# Altium PCB Mainboard PCB.pcbdoc (part 1 of 2)
Units mil, origin at the board's own origin, x right, y up, seen from the top; angles counter-clockwise.
Board outline 6050 x 5225 mil, 2 copper layers (Top Layer, Bottom Layer); 153 components, 224 nets, 656 pads, 330 vias.
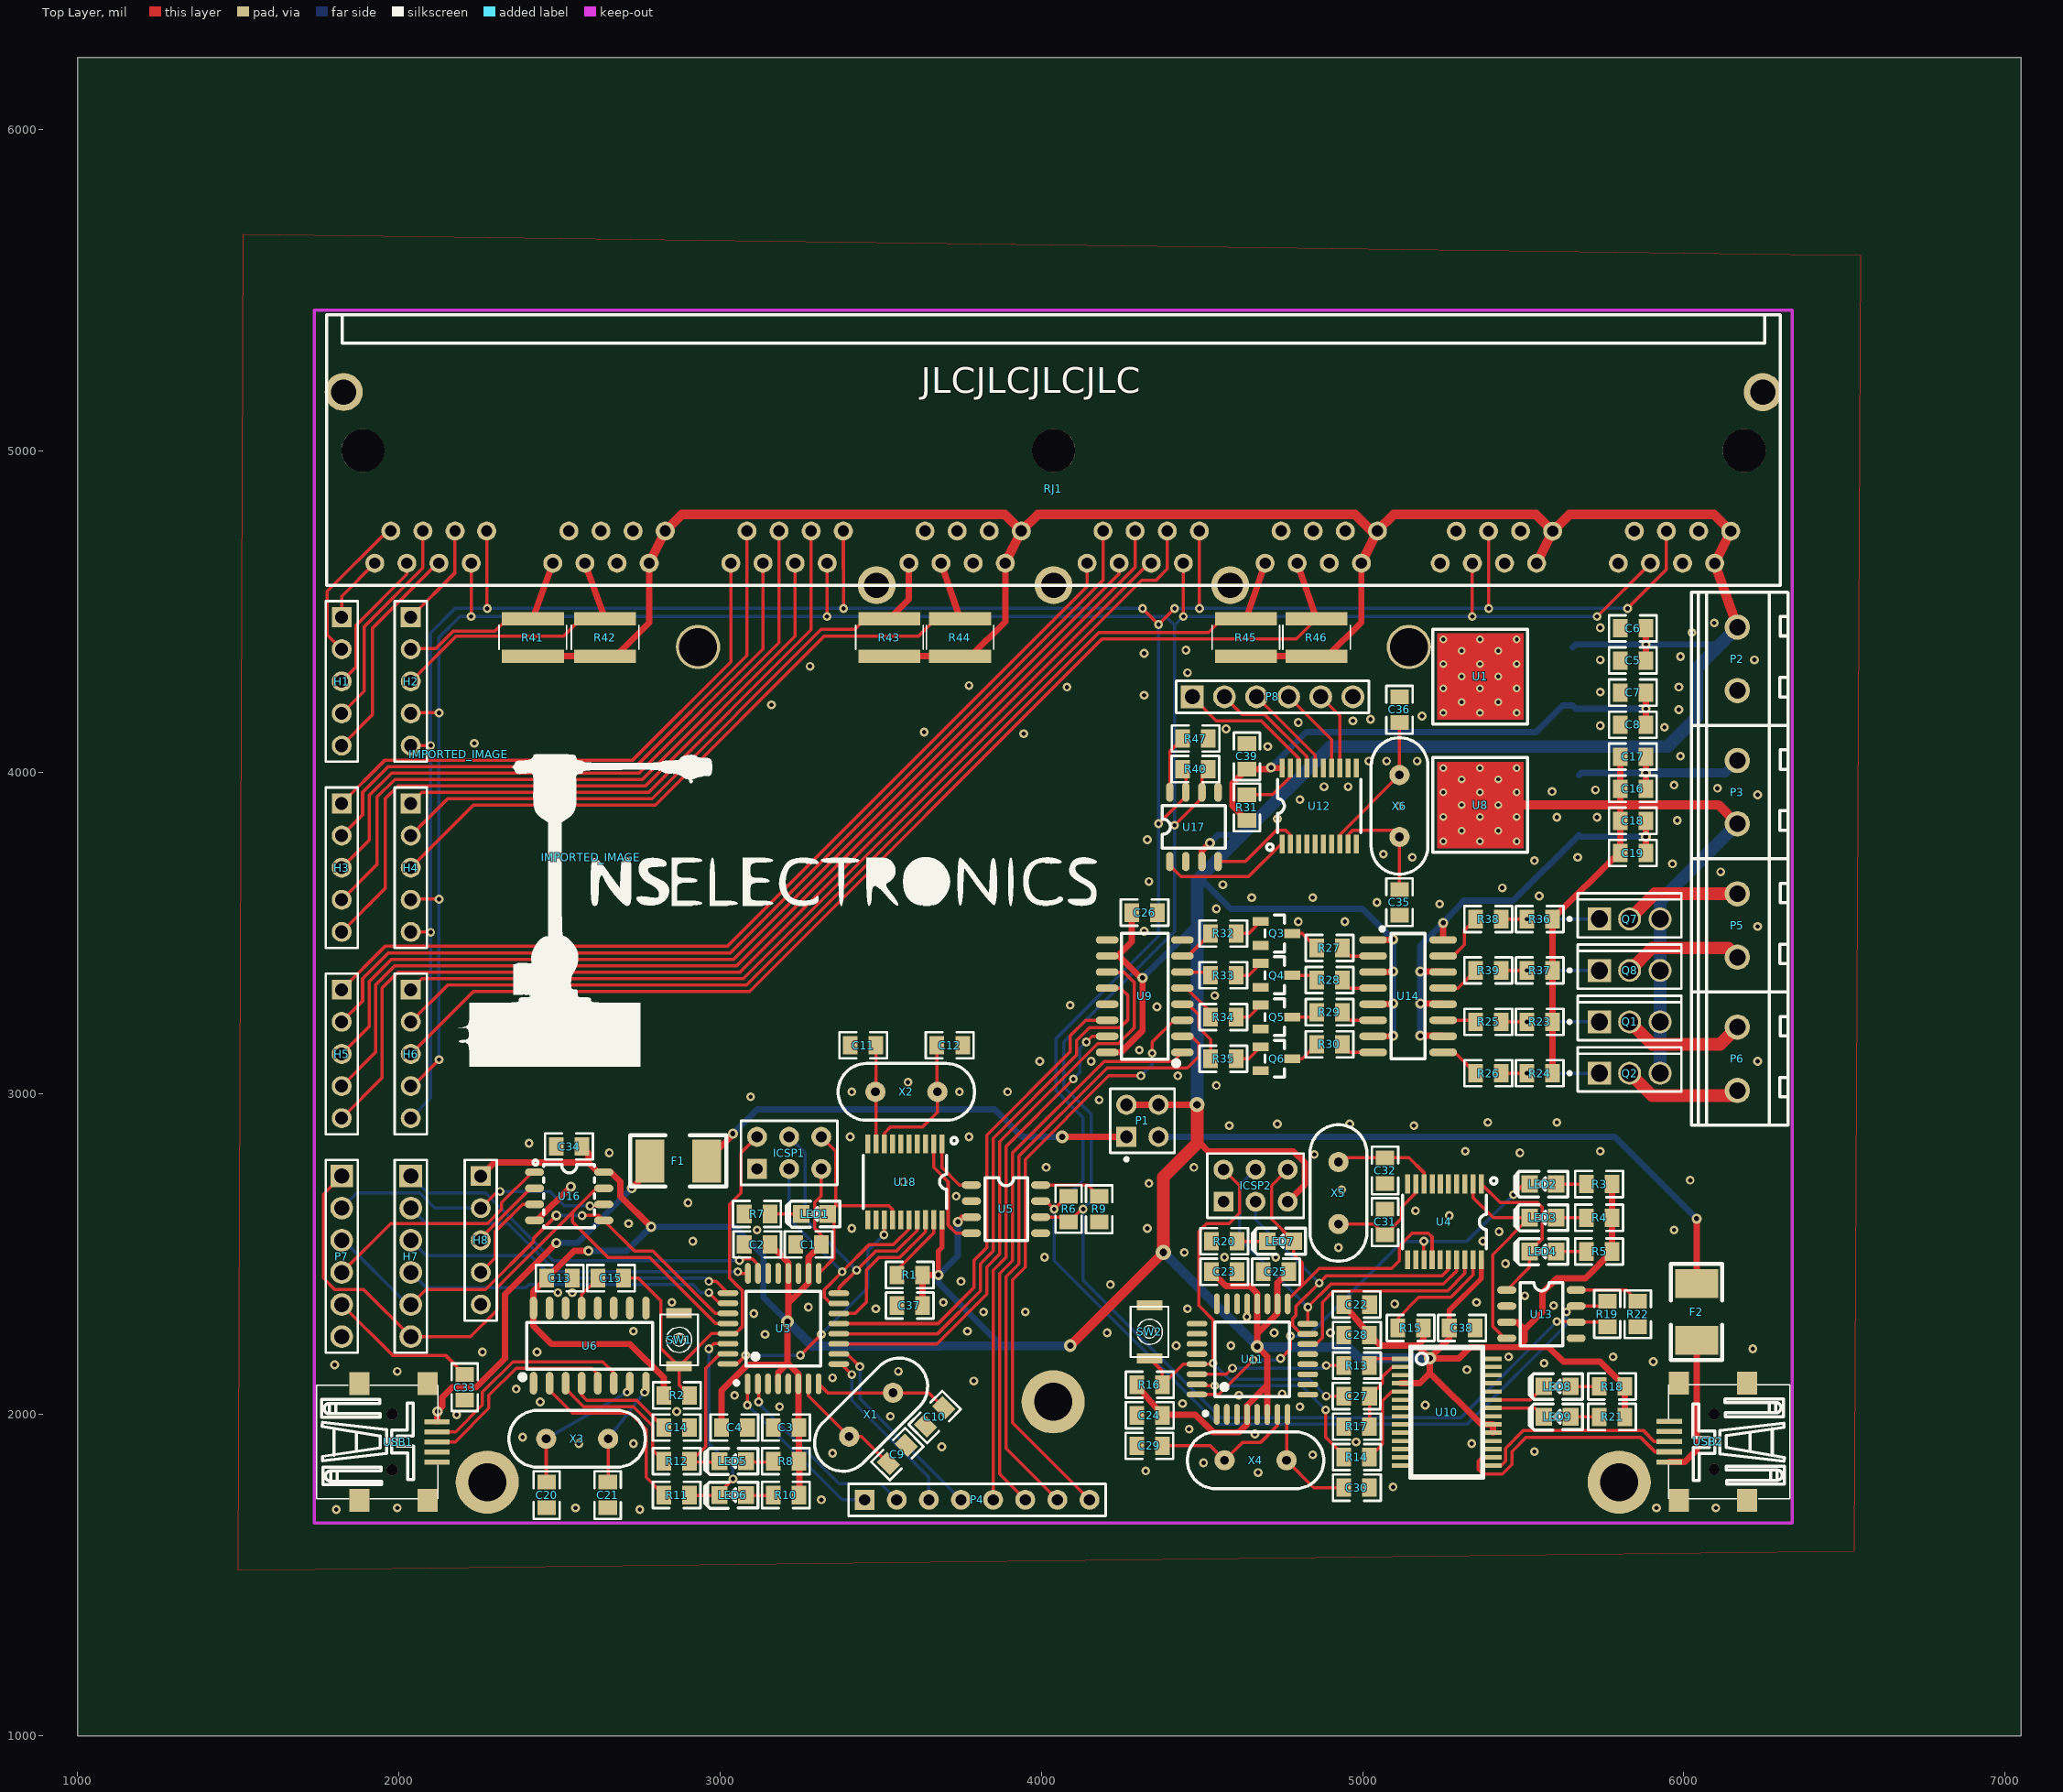
[diagram p0: Top Layer view]
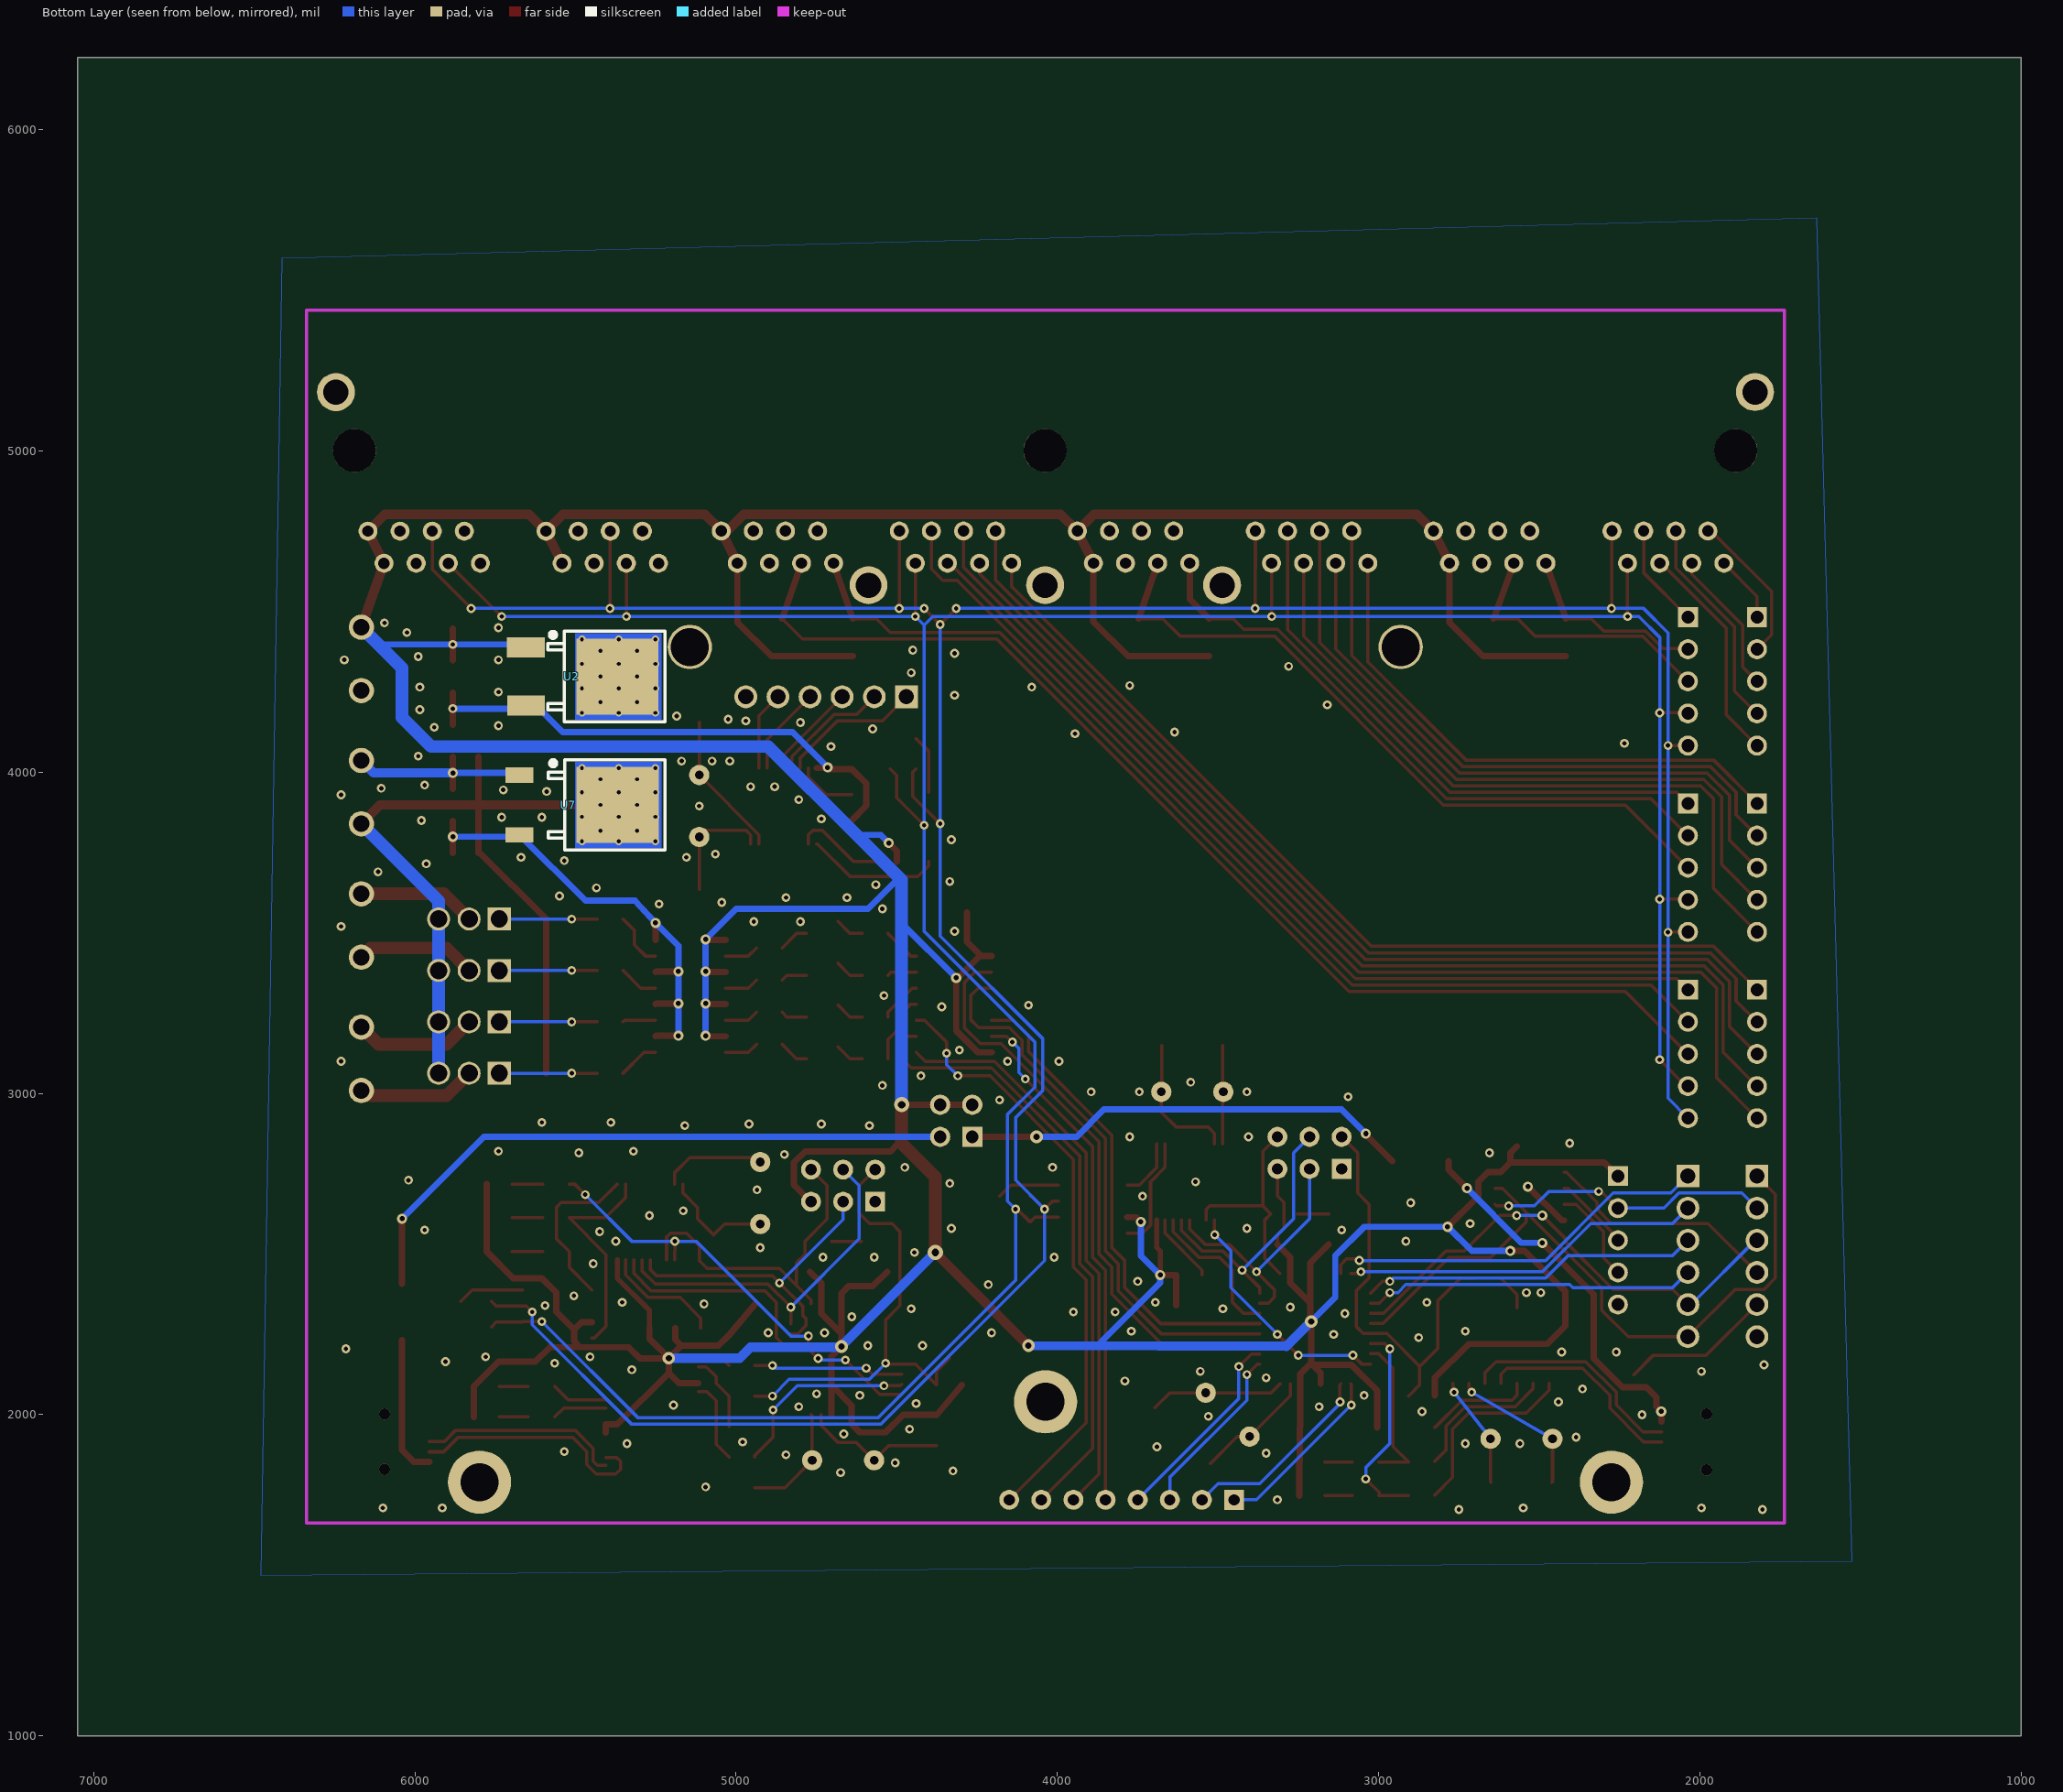
[diagram p1: Bottom Layer view, seen from below]

## Layer stack, top to bottom
Top Layer: signal copper (thickness not stored)
Dielectric: dielectric 12.6, FR-4, Dk 4.8
Bottom Layer: signal copper (thickness not stored)

## Board outline
7050,1000 1000,1000 1000,6225 7050,6225

## Components (designator, comment, footprint, x,y, rotation, side; value= is the part's Value field where it differs from the comment)
C1 "2.2uF" 0805#1 3315,2530 r180 top
C2 "100nF" 0805#1 3155,2530 r180 top
C3 "100nF" 0805#1 3245,1960 r180 top
C4 "100nF" 0805#1 3005,1960 r0 top
C5 "100nF" 0805#2 5841.99,4348.01 r0 top
C6 "10uF" 0805#2 5841.99,4448.01 r0 top
C7 "100nF" 0805#2 5841.99,4248.01 r0 top
C8 "10uF" 0805#2 5841.99,4148.01 r0 top
C9 "22pF" 0805#1 3580,1905 r225 top
C10 "22pF" 0805#1 3640,1965 r45 top
C11 "27pF" 0805#2 3445,3150 r180 top
C12 "27pF" 0805#2 3715,3150 r0 top
C13 "100nF" 0805#1 2540,2425 r180 top
C14 "100nF" 0805#1 2825,1960 r0 top
C15 "100nF" 0805#1 2700,2425 r180 top
C16 "100nF" 0805#2 5841.99,3948.75 r0 top
C17 "10uF" 0805#2 5841.99,4048.75 r0 top
C18 "100nF" 0805#2 5841.99,3848.75 r0 top
C19 "10uF" 0805#2 5841.99,3748.75 r0 top
C20 "22pF" 0805#1 2460,1710 r90 top
C21 "22pF" 0805#1 2650,1710 r90 top
C22 "2.2uF" 0805#1 4941.99,2343.01 r0 top
C23 "100nF" 0805#1 4530,2445 r0 top
C24 "100nF" 0805#1 4376.99,1998.01 r180 top
C25 "100nF" 0805#1 4770,2445 r180 top
C26 "100nF" 0805#1 4281.99,3563.01 r0 top
C27 "100nF" 0805#1 4941.99,2058.01 r0 top
C28 "100nF" 0805#1 5021.99,2248.01 r180 top
C29 "22pF" 0805#1 4296.99,1903.01 r0 top
C30 "22pF" 0805#1 5021.99,1773.01 r180 top
C31 "27pF" 0805#2 5070,2600 r90 top
C32 "27pF" 0805#2 5070,2760 r270 top
C33 "10uF" 0805#1 2205,2125 r270 top
C34 "100nF" 0805#1 2490,2835 r0 top
C35 "27pF" 0805#2 5115,3595 r270 top
C36 "27pF" 0805#2 5115,4195 r90 top
C37 "100nF" 0805#1 3630,2340 r180 top
C38 "100nF" 0805#1 5270,2270 r0 top
C39 "100nF" 0805#1 4640,4010 r90 top
F1 "MF-MSMF030-2" 1812 2870,2790 r0 top
F2 "MF-MSMF030-2" 1812 6040,2320 r90 top
H1 "ODrive1.1" HDR-5X1/2.54 1821.99,4283.01 r270 top
H2 "ODrive1.2" HDR-5X1/2.54 2036.99,4283.01 r270 top
H3 "ODrive2.1" HDR-5X1/2.54 1821.99,3703.01 r270 top
H4 "ODrive2.2" HDR-5X1/2.54 2036.99,3703.01 r270 top
H5 "ODrive3.1" HDR-5X1/2.54 1821.99,3123.01 r270 top
H6 "ODrive3.2" HDR-5X1/2.54 2036.99,3123.01 r270 top
H7 "GPIO" HDR-TH_6P-P2.54-V 2037.01,2492.99 r270 top
H8 "ATTINY GPIO" HDR-5X1/2.54 2255,2542.99 r270 top
ICSP1 "ICSP" HDR-3X2/2.54 3115,2765 r0 top
ICSP2 "ICSP" HDR-3X2/2.54 4566.99,2663.01 r0 top
IMPORTED_IMAGE "IMPORTED_IMAGE" IMPORTED_IMAGE 2185.26,4056.6 r0 top
IMPORTED_IMAGE "IMPORTED_IMAGE" IMPORTED_IMAGE 2597.66,3735.52 r0 top
LED1 "FC-A2012BK-470H2" LED-0805 3295,2625 r0 top
LED2 "FC-2012UGK-520D5" LED-0805 5561.99,2718.01 r0 top
LED3 "FC-2012UGK-520D5" LED-0805 5561.99,2613.01 r0 top
LED4 "FC-2012UGK-520D5" LED-0805 5561.99,2508.01 r0 top
LED5 "FC-2012UGK-520D5" LED-0805 3040,1855 r0 top
LED6 "FC-2012UGK-520D5" LED-0805 3040,1750 r0 top
LED7 "FC-A2012BK-470H2" LED-0805 4745,2540 r0 top
LED8 "FC-2012UGK-520D5" LED-0805 5606.99,2088.01 r0 top
LED9 "FC-2012UGK-520D5" LED-0805 5606.99,1993.01 r0 top
P1 "USB POWER" HDR-TH_4PIN-V-ROW2-COL2-MALE-PITCH2.54 4315,2915 r90 top
P2 "Power" WJ301V-5.00-2P 6166.99,4353.01 r270 top
P3 "Power2" WJ301V-5.00-2P 6166.99,3938.01 r270 top
P4 "GPIO" HDR-8X1/2.54 3800,1735 r0 top
P5 "Power" WJ301V-5.00-2P 6166.99,3523.01 r270 top
P6 "Power" WJ301V-5.00-2P 6166.99,3108.01 r270 top
P7 "ATTINY Prog" HDR-6X1/2.54 1821.99,2493.01 r270 top
P8 "CAN SPI" HDR-6X1/2.54 4720,4235 r0 top
Q1 "2SC5353BL-T60-K" TO-126C 5831.99,3223.01 r90 top
Q2 "2SC5353BL-T60-K" TO-126C 5831.99,3063.01 r90 top
Q3 "LMBT3904LT1G" SOT-23(SOT-23-3) 4731.99,3498.01 r270 top
Q4 "LMBT3904LT1G" SOT-23(SOT-23-3) 4731.99,3368.01 r270 top
Q5 "LMBT3904LT1G" SOT-23(SOT-23-3) 4731.99,3238.01 r270 top
Q6 "LMBT3904LT1G" SOT-23(SOT-23-3) 4731.99,3108.01 r270 top
Q7 "2SC5353BL-T60-K" TO-126C 5831.99,3543.01 r90 top
Q8 "2SC5353BL-T60-K" TO-126C 5831.99,3383.01 r90 top
R1 "10k" 0805#2 3590,2435 r180 top
R2 "10k" 0805#1 2905,2060 r180 top
R3 "1k" 0805#2 5736.99,2718.01 r0 top
R4 "1k" 0805#2 5736.99,2613.01 r0 top
R5 "1k" 0805#2 5736.99,2508.01 r0 top
R6 "100" 0805#2 4085,2640 r270 top
R7 "1k" 0805#1 3075,2625 r0 top
R8 "1k" 0805#1 3165,1855 r0 top
R9 "20k" 0805#2 4180,2640 r90 top
R10 "1k" 0805#1 3165,1750 r0 top
R11 "1k" 0805#1 2825,1750 r0 top
R12 "1k" 0805#1 2825,1855 r0 top
R13 "1k" 0805#1 5021.99,2153.01 r180 top
R14 "1k" 0805#1 5021.99,1868.01 r180 top
R15 "10k" 0805#2 5150,2270 r0 top
R16 "10k" 0805#1 4376.99,2093.01 r180 top
R17 "1k" 0805#2 4981.99,1963.01 r180 top
R18 "1k" 0805#1 5736.99,2088.01 r0 top
R19 "100" 0805#2 5761.99,2313.01 r270 top
R20 "1k" 0805#1 4530,2540 r0 top
R21 "1k" 0805#1 5736.99,1993.01 r0 top
R22 "20k" 0805#2 5856.99,2313.01 r90 top
R23 "100k" 0805#1 5511.99,3223.01 r0 top
R24 "100k" 0805#1 5511.99,3063.01 r0 top
R25 "1k" 0805#1 5351.99,3223.01 r0 top
R26 "1k" 0805#1 5351.99,3063.01 r0 top
R27 "220" 0805#1 4936.99,3453.01 r180 top
R28 "220" 0805#1 4936.99,3353.01 r180 top
R29 "220" 0805#1 4936.99,3253.01 r180 top
R30 "220" 0805#1 4936.99,3153.01 r180 top
R31 "10k" 0805#2 4640,3890 r270 top
R32 "1k" 0805#1 4526.99,3498.01 r0 top
R33 "1k" 0805#1 4526.99,3368.01 r0 top
R34 "1k" 0805#1 4526.99,3238.01 r0 top
R35 "1k" 0805#1 4526.99,3108.01 r0 top
R36 "100k" 0805#1 5511.99,3543.01 r0 top
R37 "100k" 0805#1 5511.99,3383.01 r0 top
R38 "1k" 0805#1 5351.99,3543.01 r0 top
R39 "1k" 0805#1 5351.99,3383.01 r0 top
R40 "100" 0805#2 4480,4010 r0 top
R41 "10k" R_1218 2416.99,4478.01 r270 top
R42 "10k" R_1218 2641.99,4478.01 r270 top
R43 "10k" R_1218 3526.99,4478.01 r270 top
R44 "10k" R_1218 3746.99,4478.01 r270 top
R45 "10k" R_1218 4636.99,4478.01 r270 top
R46 "10k" R_1218 4856.99,4478.01 r270 top
R47 "20k" 0805#2 4480,4105 r180 top
RJ1 "DS1130-S80BP" DS1130-S80BP 4036.99,4883.01 r0 top
SW1 "SKRKAEE020" SKRKAEE020 2871.99,2233.01 r270 top
SW2 "SKRKAEE020" SKRKAEE020 4336.99,2258.01 r270 top
U1 "Heatsink 6.8x6.8" "HEATSINK 6.8X6.8" 5366.99,4298.01 r0 top
U2 "AP7363-33D-13" TO-252-3_L6.5-W5.8-P4.58-BR 5511.99,4298.01 r180 bottom
U3 "ATMEGA328P-AU" TQFP-32_7X7X08P 3196.99,2268.01 r90 top
U4 "MCP2515T-I/ST" TSSOP-20_L6.5-W4.4-P0.65-LS6.4-BL 5255,2600 r180 top
U5 "MCP2551T-I/SN" SOIC-8_L5.0-W4.0-P1.27-LS6.0-BL 3890,2640 r270 top
U6 "CH340G" SOIC-16_150MIL#1 2595,2210 r0 top
U7 "BA7805FP-E2" TO-252-2 5521.99,3898.01 r90 bottom
U8 "Heatsink 6.8x6.8" "HEATSINK 6.8X6.8" 5366.99,3898.01 r0 top
U9 "SN74HC595DR" SOIC-16_150MIL#2 4321.99,3303.01 r90 top
U10 "FT232RLSSOP" SSOP28DB 5261.99,2008.01 r270 top
U11 "ATMEGA328P-AU" TQFP-32_7X7X08P 4656.99,2173.01 r90 top
U12 "MCP2515T-I/ST" TSSOP-20_L6.5-W4.4-P0.65-LS6.4-BL 4865,3895 r0 top
U13 "MCP2551T-I/SN" SOIC-8_L5.0-W4.0-P1.27-LS6.0-BL 5556.99,2313.01 r270 top
U14 "PS2801-4" SOP-16_150MIL 5141.99,3303.01 r0 top
U16 "ATTINY85V-10SU" SOIC-8_L4.9-W3.9-P1.27-LS6.0-BL 2530,2680 r270 top
U17 "MCP2551T-I/SN" SOIC-8_L5.0-W4.0-P1.27-LS6.0-BL 4475,3830 r0 top
U18 "MCP2515T-I/ST" TSSOP-20_L6.5-W4.4-P0.65-LS6.4-BL 3575,2725 r180 top
USB1 "MINI 5PMotherboard Copper shell with column LCPVinyl" USB-MINI-3 1876.99,1733.01 r270 top
USB2 "MINI 5PMotherboard Copper shell with column LCPVinyl" USB-MINI-3 6196.99,2098.01 r90 top
X1 "16MHz" OSC-49S-1 3470,2000 r315 top
X2 "16MHz" OSC-49S-1 3580,3005 r270 top
X3 "12MHz" OSC-49S-1 2555,1925 r270 top
X4 "16MHz" OSC-49S-1 4666.99,1858.01 r270 top
X5 "16MHz" OSC-49S-1 4925,2690 r0 top
X6 "16MHz" OSC-49S-1 5115,3895 r0 top

## Footprints (in the part's own frame and the unit in brackets; to place one, negate y for a bottom-side part, rotate by r counter-clockwise, add the part's x,y. Pads: shape width x height; smd on the part's side, far side on the other; paste and mask are expansions set on the pad)
0805#1 [mm]
  rect 1.16x1.47 smd: 1(0,0) 2(2.032,0)
  silkscreen extent -0.88,-1.04 2.89,1.04
0805#2 [mm]
  rect 1.16x1.45 smd: 1(-1.016,0) 2(1.016,0)
  silkscreen extent -1.9,-1.03 1.87,1.04
1812 [mil]
  rect 90x133.86 smd: 1(-88,0) 2(88,0)
  silkscreen extent -150,-80 150,80
DS1130-S80BP [mm]
  round 3 hole 2: 0(-56.109,7.635) 0(-13.967,-7.635) 0(0.028,-7.635) 0(13.998,-7.635) 0(56.109,7.63)
  round 1.5 hole 0.9: 1(-53.647,-5.895) 2(-52.377,-3.355) 3(-51.107,-5.895) 4(-49.837,-3.355) 5(-48.567,-5.895) 6(-47.297,-3.355) 7(-46.027,-5.895) 8(-44.798,-3.355) 9(-39.568,-5.895) 10(-38.298,-3.355) 11(-37.028,-5.895) 12(-35.758,-3.355) 13(-34.488,-5.895) 14(-33.218,-3.355) 15(-31.948,-5.895) 16(-30.678,-3.355) 17(-25.486,-5.895) 18(-24.216,-3.355) 19(-22.946,-5.895) 20(-21.676,-3.355) 21(-20.406,-5.895) 22(-19.136,-3.355) 23(-17.866,-5.895) 24(-16.596,-3.355) 25(-11.407,-5.895) 26(-10.137,-3.355) 27(-8.867,-5.895) 28(-7.597,-3.355) 29(-6.327,-5.895) 30(-5.057,-3.355) 31(-3.787,-5.895) 32(-2.517,-3.355) 33(2.672,-5.895) 34(3.942,-3.355) 35(5.212,-5.895) 36(6.482,-3.355) 37(7.752,-5.895) 38(9.022,-3.355) 39(10.292,-5.895) 40(11.562,-3.355) 41(16.751,-5.895) 42(18.021,-3.355) 43(19.291,-5.895) 44(20.561,-3.355) 45(21.831,-5.895) 46(23.101,-3.355) 47(24.371,-5.895) 48(25.641,-3.355) 49(30.607,-5.9) 50(31.877,-3.36) 51(33.147,-5.9) 52(34.417,-3.36) 53(35.687,-5.9) 54(36.957,-3.36) 55(38.227,-5.9) 56(39.497,-3.36) 57(44.686,-5.9) 58(45.956,-3.36) 59(47.226,-5.9) 60(48.496,-3.36) 61(49.766,-5.9) 62(51.036,-3.36) 63(52.306,-5.9) 64(53.576,-3.36)
  round 3.4 hole 3.4 unplated: ""(-54.59,3.015) ""(0.028,3.015) ""(54.648,3.015)
  silkscreen extent -57.45,-7.64 57.5,13.76
HDR-3X2/2.54 [mil]
  rect 62x62 hole 35: 1(0,0)
  round 62 hole 35: 2(0,100) 3(100,0) 4(100,100) 5(200,0) 6(200,100)
  silkscreen extent -50,-50 250,150
HDR-5X1/2.54 [mil]
  rect 62x62 hole 40.16: 1(-200,0)
  round 62 hole 40.16: 2(-100,0) 3(0,0) 4(100,0) 5(200,0)
  silkscreen extent -250,-50 250,50
HDR-6X1/2.54 [mm]
  rect 1.8x1.8 hole 1.2: 1(-6.35,0)
  round 1.8 hole 1.2: 2(-3.81,0) 3(-1.27,0) 4(1.27,0) 5(3.81,0) 6(6.35,0)
  silkscreen extent -7.62,-1.27 7.62,1.27
HDR-8X1/2.54 [mil]
  rect 62x62 hole 35: 1(-350,0)
  round 62 hole 35: 2(-250,0) 3(-150,0) 4(-50,0) 5(50,0) 6(150,0) 7(250,0) 8(350,0)
  silkscreen extent -400,-50 400,50
HDR-TH_4PIN-V-ROW2-COL2-MALE-PITCH2.54 [mm]
  rect 1.6x1.6 hole 1: 1(-1.27,1.27)
  round 1.6 hole 1: 2(1.27,1.27) 3(-1.27,-1.27) 4(1.27,-1.27)
  silkscreen extent -3.18,-2.54 2.54,2.54
HDR-TH_6P-P2.54-V [mm]
  rect 1.8x1.8 hole 1.2: 1(-6.35,0)
  round 1.8 hole 1.2: 2(-3.81,0) 3(-1.27,0) 4(1.27,0) 5(3.81,0) 6(6.35,0)
  silkscreen extent -7.62,-1.27 7.62,1.27
"HEATSINK 6.8X6.8" [mil]
  round 0 smd far side: 2(-0.11,0.11)
  round 0 smd: 2(0.11,-0.11)
  Top Layer region: -133.75,-133.97 133.97,-133.97 133.97,133.75 -133.75,133.75
  Bottom Layer region: -133.97,-133.75 133.75,-133.75 133.75,133.97 -133.97,133.97
  silkscreen extent -148,-147 147,148
IMPORTED_IMAGE [mil]
  silkscreen extent 0,-973 789,0
LED-0805 [mil]
  rect 51.2x55.1 smd: 1(40.7,0.05) 2(-42,0.05)
  silkscreen extent -88,-41 78,40
OSC-49S-1 [mm]
  round 1.6 hole 0.7: 1(0,2.45) 2(0,-2.45)
  silkscreen extent -2.25,-5.39 2.25,5.39
R_1218 [mm]
  rect 1.05x4.9 smd: 1(0,0) 2(2.96,0)
  silkscreen extent 0.53,-2.67 2.43,2.67
SKRKAEE020 [mm]
  rect 0.8x2 smd: 1(-2.1,0) 2(2.1,0)
  silkscreen extent -2,-1.5 2,1.5
SOIC-8_L4.9-W3.9-P1.27-LS6.0-BL [mm]
  oval 0.6x1.518 smd: 1(-1.905,-2.74) 2(-0.635,-2.74) 3(0.635,-2.74) 4(1.905,-2.74) 5(1.905,2.74) 6(0.635,2.74) 7(-0.635,2.74) 8(-1.905,2.74)
  silkscreen extent -2.86,-2.86 2.5,2
SOIC-8_L5.0-W4.0-P1.27-LS6.0-BL [mm]
  oval 0.6x1.518 smd: 1(-1.905,-2.74) 2(-0.635,-2.74) 3(0.635,-2.74) 4(1.905,-2.74) 5(1.905,2.74) 6(0.635,2.74) 7(-0.635,2.74) 8(-1.905,2.74)
  silkscreen extent -2.49,-1.67 2.5,1.7
SOIC-16_150MIL#1 [mil]
  oval 23.62x70.79 smd: 1(-176,-112) 2(-126,-112) 3(-76,-112) 4(-26,-112) 5(24,-112) 6(74,-112) 7(124,-112) 8(174,-112) 9(174,122) 10(124,122) 11(74,122) 12(24,122) 13(-26,122) 14(-76,122) 15(-126,122) 16(-176,122)
  silkscreen extent -218,-101 195,77
SOIC-16_150MIL#2 [mil]
  oval 23.62x70.79 smd: 1(-175,-117) 2(-125,-117) 3(-75,-117) 4(-25,-117) 5(25,-117) 6(75,-117) 7(125,-117) 8(175,-117) 9(175,117) 10(125,117) 11(75,117) 12(25,117) 13(-25,117) 14(-75,117) 15(-125,117) 16(-175,117)
  silkscreen extent -217,-106 196,72
SOP-16_150MIL [mil]
  oval 86.53x23.62 smd: 1(-109,175) 2(-109,125) 3(-109,75) 4(-109,25) 5(-109,-25) 6(-109,-75) 7(-109,-125) 8(-109,-175) 9(109,-175) 10(109,-125) 11(109,-75) 12(109,-25) 13(109,25) 14(109,75) 15(109,125) 16(109,175)
  silkscreen extent -87,-195 53,215
SOT-23(SOT-23-3) [mm]
  rect 0.7x1.25 smd: 1(-0.95,-1.25) 2(0.95,-1.25) 3(0,1.25)
  silkscreen extent -1.46,-0.9 1.46,0.65
SSOP28DB [mil]
  rect 13.7x55 smd: 1(-166,-144) 2(-141,-144) 3(-115,-144) 4(-90,-144) 5(-64,-144) 6(-38,-144) 7(-13,-144) 8(13,-144) 9(38,-144) 10(64,-144) 11(90,-144) 12(115,-144) 13(141,-144) 14(166,-144) 15(166,144) 16(141,144) 17(115,144) 18(90,144) 19(64,144) 20(38,144) 21(13,144) 22(-13,144) 23(-38,144) 24(-64,144) 25(-90,144) 26(-115,144) 27(-141,144) 28(-166,144)
  silkscreen extent -205,-115 205,115
TO-126C [mil]
  rect 71.5x71.5 hole 54: 1(0,94.5)
  round 71.5 hole 54: 2(0,0.5) 3(0,-94.5)
  silkscreen extent -57,-161 81,192
TO-252-2 [mil]
  rect 47.24x86.62 smd: 1(93,152.6) 3(-93,152.4)
  rect 236.22x255.9 smd: 4(0,-152.6)
  silkscreen extent -141,-301 141,63
TO-252-3_L6.5-W5.8-P4.58-BR [mil]
  rect 118.1x63 smd: 1(-142.4,90.52)
  rect 255.9x236.2 smd: 2(142.4,-0.03)
  rect 118.2x63 smd: 3(-142.15,-90.53)
  silkscreen extent -74,-141 290,141
TQFP-32_7X7X08P [mm]
  oval 1.65x0.45 smd: 1(-4.369,2.817) 2(-4.369,2.017) 3(-4.369,1.217) 4(-4.369,0.417) 5(-4.369,-0.381) 6(-4.369,-1.181) 7(-4.369,-1.981) 8(-4.369,-2.781) 17(4.369,-2.791) 18(4.369,-1.991) 19(4.369,-1.191) 20(4.369,-0.391) 21(4.369,0.406) 22(4.369,1.207) 23(4.369,2.007) 24(4.369,2.807)
  oval 0.45x1.65 smd: 9(-2.804,-4.381) 10(-2.004,-4.381) 11(-1.204,-4.381) 12(-0.404,-4.381) 13(0.394,-4.381) 14(1.194,-4.381) 15(1.994,-4.381) 16(2.794,-4.381) 25(2.804,4.381) 26(2.004,4.381) 27(1.204,4.381) 28(0.404,4.381) 29(-0.394,4.381) 30(-1.194,4.381) 31(-1.994,4.381) 32(-2.794,4.381)
  silkscreen extent -4.45,-2.94 2.95,3.86
TSSOP-20_L6.5-W4.4-P0.65-LS6.4-BL [mil]
  rect 15.74x58.8 smd: 1(-115.16,-118.16) 5(-12.8,-118.14) 6(12.74,-118.14) 7(38.38,-118.14) 8(63.97,-118.14) 9(89.56,-118.14) 10(115.15,-118.14) 19(-89.56,117.95) 20(-115.16,118.16)
  rect 15.75x58.8 smd: 2(-89.56,-118.14) 3(-63.97,-118.14) 4(-38.38,-118.14) 11(115.16,118.16) 12(89.57,118.16) 13(63.98,118.16) 14(38.39,118.16) 15(12.8,118.16) 16(-12.79,118.16) 17(-38.38,118.16) 18(-63.97,117.95)
  silkscreen extent -164,-138 130,83
USB-MINI-3 [mm]
  rect 1.8x1.6 smd: 0(-9.25,5.4) 0(-9.25,0) 0(0,5.4) 0(0,0)
  rect 0.4x2 smd: 1(-6.225,6.148) 2(-5.425,6.148) 3(-4.625,6.148) 4(-3.825,6.148) 5(-3.025,6.148)
  silkscreen extent -9.12,-3.4 -0.12,6.2
WJ301V-5.00-2P [mm]
  round 2 hole 1.3: 1(-2.504,0) 2(2.504,0)
  silkscreen extent -5.27,-3.62 5.26,4.01

## Free pads (board coordinates)
  round 196.85 hole 118.11: 1(2274.99,1790) 1(4037,2040.01) 1(5799.01,1790)
  round 137.79 hole 118.11: 1(2931.37,4390.01) 1(5144.25,4390.01)

## Via types
v1: diameter 27.56, hole 13.78, Top Layer to Bottom Layer, 259 vias
v2: diameter 24.41, hole 12, Top Layer to Bottom Layer, 36 vias
v3: diameter 31.5, hole 15.75, Top Layer to Bottom Layer, 24 vias
v4: diameter 39.37, hole 19.69, Top Layer to Bottom Layer, 5 vias
v5: diameter 35.43, hole 35.43, Top Layer to Bottom Layer, 4 vias
v6: diameter 47.24, hole 23.62, Top Layer to Bottom Layer, 2 vias

## Nets (pads, with @x,y where several pads share a name; then routed paths per layer and width w, separated by ;. In a path a pad name is that pad's centre, name@x,y a point inside that pad or via, vN(x,y) a via of type N, cw(c..) or ccw(c..) an arc to the next point about the centre after c; other vN are vias at no path point)
1.1: RJ1.57
1.2: RJ1.58
1ATT1: H8.2 P7.2 U16.6 | length 897
  Top Layer w10: H8.2@2255,2642.99 2307.01,2694.99 v1(2315.01,2694.99) ; v1(2595.01,2649.99) 2632.87,2650 U16.6@2637.87,2655
  Bottom Layer w10: P7.2@1821.99,2643.01 1868.99,2690.01 2064.99,2690.01 2111.99,2643.01 H8.2@2255,2642.99 ; v1(2315.01,2694.99) 2469.99,2695.01 2514.99,2650.01 v1(2595.01,2649.99)
1ATT3: H8.3 U16.2 | length 238.3
  Top Layer w10: H8.3@2255,2542.99 2254.99,2550.01 2409.99,2705.01 U16.2@2422.13,2705
1ATT4: H8.4 U16.3 | length 303
  Top Layer w10: H8.4@2255,2442.99 2299.99,2488.01 2299.99,2570.01 2384.99,2654.99 U16.3@2422.13,2655
1ATTR: P7.4 U16.1 | length 740.8
  Top Layer w10: P7.4@1821.99,2443.01 1974.99,2595.01 2274.99,2595.01 2319.99,2640.01 2319.99,2660.01 2414.99,2755.01 U16.1@2422.13,2755
1SR1: P4.5 U9.15 | length 1617.6
  Top Layer w10: P4.5@3850,1735 3849.99,2450.01 3889.99,2490.01 3889.99,2834.98 v1(4100.01,3044.99) ; v1(4140.01,3159.99) 4158.02,3178.01 U9.15@4204.99,3178.01
  Bottom Layer w10: v1(4100.01,3044.99) 4119.99,3065.01 4119.99,3140.01 v1(4140.01,3159.99)
1SR2: P4.6 U9.1 | length 1788.4
  Top Layer w10: P4.6@3950,1735 3869.99,1815.01 3869.99,2440.01 3909.99,2480.01 3909.99,2815.01 4194.99,3100.01 4410.99,3100.01 U9.1@4438.99,3128.01
1SR3: P4.7 U9.2 | length 1941.8
  Top Layer w10: P4.7@4050,1735 3889.99,1895.01 3889.99,2430.01 3929.99,2470.01 3929.99,2805.01 4204.99,3080.01 4454.99,3080.01 4489.99,3115.01 4489.99,3155.01 4466.99,3178.01 U9.2@4438.99,3178.01
1SR4: P4.8 U9.3 | length 1885.3
  Top Layer w10: P4.8@4150,1735 3909.99,1975.01 3909.99,2420.01 3949.99,2460.01 3949.99,2795.01 4209.99,3055.01 v1(4310.01,3054.99) ; v1(4345.01,3124.99) 4344.99,3160.01 4412.99,3228.01 U9.3@4438.99,3228.01
  Bottom Layer w10: v1(4310.01,3054.99) 4345,3090 v1(4345.01,3124.99)
1SR5: R35.1 U9.4 | length 217
  Top Layer w10: U9.4@4438.99,3278.01 4456.99,3278.01 4489.99,3245.01 4489.99,3205.01 4526.99,3168.01 R35.1@4527.01,3107.99
1SR6: R34.1 U9.5 | length 134.1
  Top Layer w10: U9.5@4438.99,3328.01 4451.99,3328.01 4527.01,3252.99 R34.1@4527.01,3237.99
1SR7: R33.1 U9.6 | length 92.2
  Top Layer w10: U9.6@4438.99,3378.01 4516.99,3378.01 R33.1@4527.01,3367.99
1SR8: R32.1 U9.7 | length 117
  Top Layer w10: U9.7@4438.99,3428.01 4457.02,3428.01 R32.1@4527.01,3497.99
2.1: RJ1.49
2.2: RJ1.50
3.1: H6.2 R45.1 RJ1.41 | length 3302.7
  Top Layer w10: H6.2@2036.99,3223.01 2151.99,3338.01 3081.99,3338.01 4178.99,4435.01 4519.99,4435.01 4562.99,4478.01 R45.1@4636.99,4478.01
  Top Layer w19.68: R45.1@4636.99,4478.01 RJ1.41@4696.49,4650.9
4.1: H5.1 RJ1.33 | length 2912.8
  Top Layer w10: H5.1@1821.99,3323.01 1956.99,3458.01 3021.99,3458.01 4142.19,4578.2 RJ1.33@4142.19,4650.9
4.2: H5.2 RJ1.34 | length 3133.5
  Top Layer w10: H5.2@1821.99,3223.01 1886.99,3288.01 1886.99,3358.01 1966.99,3438.01 3031.99,3438.01 4192.19,4598.2 RJ1.34@4192.19,4750.9
4.3: H5.3 RJ1.35 | length 3154.2
  Top Layer w10: H5.3@1821.99,3123.01 1906.99,3208.01 1906.99,3348.01 1976.99,3418.01 3041.99,3418.01 4242.19,4618.2 RJ1.35@4242.19,4650.9
4.4: H5.4 RJ1.36 | length 3375
  Top Layer w10: H5.4@1821.99,3023.01 1926.99,3128.01 1926.99,3338.01 1986.99,3398.01 3051.99,3398.01 4292.19,4638.2 RJ1.36@4292.19,4750.9
4.5: H5.5 RJ1.37 | length 3399.9
  Top Layer w10: H5.5@1821.99,2923.01 1946.99,3048.01 1946.99,3328.01 1996.99,3378.01 3061.99,3378.01 4334.9,4650.9 RJ1.37@4342.19,4650.9
4.6: H6.1 RJ1.38 | length 3015.6
  Top Layer w10: H6.1@2036.99,3323.01 2071.99,3358.01 3071.99,3358.01 4311.99,4598.01 4356.99,4598.01 4392.19,4633.2 RJ1.38@4392.19,4750.9
5VIN1: F1.1 USB1.1 | length 1167.6
  Top Layer w19.68: USB1.1@2119.04,1978.08 v3(2119.99,2010.01) 2134.99,2025.01 2134.99,2054.11 2165.89,2085.01 2239.99,2085.01 2329.99,2175.01 2329.99,2178.61 2329.99,2374.99 v3(2490.01,2534.99) ; v3(2725.01,2704.99) 2782.01,2761.99 F1.1@2782,2790
  Bottom Layer w19.68: v3(2490.01,2534.99) 2555.01,2534.99 v3(2725.01,2704.99)
5VIN2: F2.1 USB2.1 | length 442.4
  Top Layer w19.68: USB2.1@5954.95,1852.93 6002.92,1852.92 6040,1890 F2.1@6040,2232
6.1: H3.1 RJ1.17 | length 1701.4
  Top Layer w10: H3.1@1821.99,3903.01 1956.99,4038.01 2727.99,4038.01 3033.59,4343.6 RJ1.17@3033.59,4650.9
6.2: H3.2 RJ1.18 | length 1922.1
  Top Layer w10: H3.2@1821.99,3803.01 1886.99,3868.01 1886.99,3938.01 1966.99,4018.01 2737.99,4018.01 3083.59,4363.6 RJ1.18@3083.59,4750.9
6.3: H3.3 RJ1.19 | length 1942.8
  Top Layer w10: H3.3@1821.99,3703.01 1906.99,3788.01 1906.99,3928.01 1976.99,3998.01 2747.99,3998.01 3133.59,4383.6 RJ1.19@3133.59,4650.9
6.4: H3.4 RJ1.20 | length 2163.5
  Top Layer w10: H3.4@1821.99,3603.01 1931.99,3713.01 1931.99,3923.01 1986.99,3978.01 2757.99,3978.01 3183.59,4403.6 RJ1.20@3183.59,4750.9
6.5: H3.5 RJ1.21 | length 2184.2
  Top Layer w10: H3.5@1821.99,3503.01 1956.99,3638.01 1956.99,3918.01 1996.99,3958.01 2767.99,3958.01 3233.59,4423.6 RJ1.21@3233.59,4650.9
6.6: H4.1 RJ1.22 | length 1777.8
  Top Layer w10: H4.1@2036.99,3903.01 2071.99,3938.01 2777.99,3938.01 3283.59,4443.6 RJ1.22@3283.59,4750.9
7.1: H2.2 R41.1 RJ1.9 | length 603.1
  Top Layer w10: H2.2@2036.99,4383.01 2038.99,4385.01 2114.99,4385.01 2169.99,4440.01 2299.99,4440.01 2337.99,4478.01 R41.1@2416.99,4478.01
  Top Layer w19.68: R41.1@2416.99,4478.01 RJ1.9@2479.2,4650.9
7.3: H2.3 R42.1 RJ1.11 | length 869.7
  Top Layer w10: H2.3@2036.99,4283.01 2176.99,4423.01 2511.99,4423.01 2566.99,4478.01 R42.1@2641.99,4478.01
  Top Layer w19.68: RJ1.11@2579.2,4650.9 R42.1@2641.99,4478.01
8.1: H1.1 RJ1.1 | length 210.5
  Top Layer w10: H1.1@1821.99,4483.01 1821.99,4548.01 RJ1.1@1924.89,4650.9
8.2: H1.2 RJ1.2 | length 474.4
  Top Layer w10: H1.2@1821.99,4383.01 1776.99,4428.01 1776.99,4563.01 1964.89,4750.9 RJ1.2@1974.89,4750.9
8.3: H1.3 RJ1.3 | length 451.9
  Top Layer w10: H1.3@1821.99,4283.01 1866.99,4328.01 1866.99,4458.01 2024.89,4615.9 RJ1.3@2024.89,4650.9
8.4: H1.4 RJ1.4 | length 672.7
  Top Layer w10: H1.4@1821.99,4183.01 1891.99,4253.01 1891.99,4453.01 2074.89,4635.9 RJ1.4@2074.89,4750.9
8.5: H1.5 RJ1.5 | length 696.3
  Top Layer w10: H1.5@1821.99,4083.01 1916.99,4178.01 1916.99,4448.01 2119.89,4650.9 RJ1.5@2124.89,4650.9
8.6: H2.1 RJ1.6 | length 325
  Top Layer w10: H2.1@2036.99,4483.01 2174.89,4620.9 RJ1.6@2174.89,4750.9
+3.3V: C7.2 C8.2 C39.1 R31.2 U2.3 U12.20 | length 1660.6
  Top Layer w19.68: R31.2@4640,3850 4595,3895 4595,3965 C39.1@4640.01,4010.01 4710.02,4010.01 v3(4715.01,4014.99) 4716.85,4013.15 U12.20@4749.84,4013.16 ; C8.2@5881.99,4148.01 v1(5881.99,4198.01) C7.2@5881.99,4248.01
  Bottom Layer w19.68: v3(4715.01,4014.99) 4825.02,4125.01 5539.99,4125.01 5622.49,4207.51 U2.3@5654.15,4207.48 ; U2.3@5654.15,4207.48 5663.62,4198.01 v1(5881.99,4198.01)
+5V: C1.1 C2.1 C3.1 C4.1 C5.2 C6.2 C13.2 C22.1 C23.1 C24.1 C25.1 C26.1 C28.1 C34.2 C37.1 C38.1 H8.1 ICSP1.5 ICSP2.5 P1.2 P1.4 P2.1 R1.1 R2.2 R3.2 R4.2 R5.2 R8.2 R10.2 R15.2 R16.2 R18.2 R21.2 R41.2 R42.2 R43.2 R44.2 R45.2 R46.2 RJ1.15 RJ1.16 RJ1.31 RJ1.32 RJ1.47 RJ1.48 RJ1.55 RJ1.56 RJ1.63 RJ1.64 U2.1 U3.4 U3.6 U3.18 U3.20 U4.20 U5.3 U6.16 U9.10 U9.16 U10.4 U10.19 U10.20 U11.4 U11.6 U11.18 U11.20 U13.3 U14.1 U14.3 U14.5 U14.7 U16.8 U17.3 U18.20 | length 24365.9
  Top Layer w10: C1.1@3314.99,2530.01 3314.99,2560.01 3294.99,2580.01 3294.99,2660.01 3314.99,2680.01 ICSP1.5@3315,2765
  Top Layer w15.75: v3(3680.01,2434.99) 3679.99,2510.01 3690.2,2520.2 U18.20@3690.16,2606.84 ; C38.1@5270.01,2269.99 5269.99,2325.01 5370.19,2425.2 U4.20@5370.16,2481.84
  Top Layer w19.68: H8.1@2255,2742.99 2296.99,2785.01 2589.99,2785.01 ; R41.2@2416.99,4361.47 R42.2@2641.99,4361.47 ; C34.2@2570.01,2834.99 2589.99,2815.01 2589.99,2785.01 ; v3(2590.01,2509.99) 2544.98,2510 C13.2@2459.99,2425.01 2419,2384.02 U6.16@2419,2332 2419,2276 2475,2220 2720,2220 2824.99,2115.01 R2.2@2824.99,2060.01 ; U16.8@2637.87,2755 2660.01,2754.99 2690,2725 2690,2680 v3(2785.01,2584.99) ; U16.8@2637.87,2755 2619.99,2755.01 2589.99,2785.01 ; R42.2@2641.99,4361.47 2675.49,4361.51 2779.2,4465.2 RJ1.15@2779.2,4650.9 ; C4.1@3005.01,1959.99 3004.99,2075.01 3084.99,2155.01 3214.99,2155.01 3243.49,2126.51 U3.6@3243.49,2096.01 3243.49,1961.51 C3.1@3244.99,1960.01 R8.2@3245.01,1854.99 3247.01,1852.99 R10.2@3247.01,1747.99 ; C2.1@3154.99,2530.01 3212.39,2472.61 U3.20@3212.39,2440.01 3212.39,2292.39 v4(3210.01,2289.99) 3210,2160.01 3204.99,2155.01 3180.59,2130.61 U3.4@3180.59,2096.01 ; 3212.39,2347.09 3275.39,2410.09 U3.18@3275.39,2440.01 3275.39,2490.41 C1.1@3314.99,2530.01 ; R43.2@3526.99,4361.47 R44.2@3746.99,4361.47 3780.45,4361.47 3887.89,4468.91 RJ1.31@3887.89,4650.9 ; C37.1@3629.99,2340.01 R1.1@3630,2435 v3(3680.01,2434.99) ; v3(3740.01,2599.99) 3754.99,2614.99 U5.3@3782.13,2615 ; U9.16@4204.99,3128.01 4248,3128.01 4315.01,3195.01 v3(4315.01,3359.99) 4310.01,3359.99 4241.99,3428.01 U9.10@4204.99,3428.01 4237.99,3428.01 4281.99,3472.01 C26.1@4282.01,3562.99 ; P1.2@4265,2965 P1.4@4365,2965 v6(4484.99,2965.01) ; R16.2@4296.98,2093.01 C24.1@4376.98,1998.02 4378.99,2000 4480,2000 4535,1945 4615,1945 4640.6,1970.6 U11.4@4640.6,2001.01 4640.6,2029.01 4703.49,2092.01 ; 4484.99,2845.01 4494.99,2845.01 4520,2820 4785,2820 4820,2785 4820,2716 ICSP2.5@4766.99,2663.01 ; U17.3@4500,3722.13 4500.01,3755.01 v3(4525.01,3779.99) ; C23.1@4530.01,2444.99 4575,2400 4650,2400 4672.4,2377.61 U11.20@4672.4,2345.01 v4(4672.4,2212.61) 4703.49,2181.51 U11.6@4703.49,2001.01 ; R45.2@4636.99,4361.47 R46.2@4856.99,4361.47 ; 4672.4,2252.01 4735.4,2314.91 U11.18@4735.4,2345.01 4735.39,2410.38 C25.1@4769.99,2445.01 ; R46.2@4856.99,4361.47 4890.49,4361.51 4996.49,4467.51 RJ1.47@4996.49,4650.9 ; C22.1@4942.01,2342.99 C28.1@5021.98,2248.01 5054.99,2215.01 5170.99,2215.01 ; U14.7@5032.99,3178.01 5093.01,3178.01 v3(5095.01,3179.99) ; U14.5@5032.99,3278.01 5093.01,3278.01 v3(5095.01,3279.99) ; U14.3@5032.99,3378.01 5093.01,3378.01 v3(5095.01,3379.99) ; U14.1@5032.99,3478.01 5093.01,3478.01 v3(5095.01,3479.99) ; U10.4@5117.99,2098.01 5177.99,2098.01 5209.99,2130.01 ; R15.2@5190,2270 5190,2233.99 5171.01,2215 ; C38.1@5270.01,2269.99 5270.01,2236.01 v4(5210.01,2176.01) ; U10.19@5405.99,1944.01 U10.20@5405.99,1970.01 5369.99,1970.01 5209.99,2130.01 ; U13.3@5449.12,2288.01 5481.99,2288.01 5504.99,2265.01 ; 5485.4,2210.01 5504.99,2229.61 5504.99,2265.01 ; R3.2@5776.99,2718.01 R5.2@5776.99,2508.01 5693.99,2425.01 5604.99,2425.01 5559.99,2380.01 5559.99,2320.01 5504.99,2265.01 ; R21.2@5817.01,1992.99 R18.2@5817.01,2087.99 5740,2165 5625,2165 5579.99,2210.01 5334.99,2210.01 5299.99,2175.01 5210.99,2175.01 v4(5210.01,2176.01) ; C5.2@5881.99,4348.01 v1(5881.99,4398.01) C6.2@5881.99,4448.01 ; 5170.99,2215.01 v4(5210.01,2176.01) ; 5209.99,2130.01 v4(5210.01,2176.01)
  Top Layer w29.53: RJ1.15@2779.2,4650.9 RJ1.16@2829.2,4750.9 2881.29,4803.01 3885.79,4803.01 RJ1.32@3937.89,4750.9 ; RJ1.31@3887.89,4650.9 RJ1.32@3937.89,4750.9 ; v4(4090.01,2214.99) v6(4379.99,2505.01) ; RJ1.47@4996.49,4650.9 RJ1.48@5046.49,4750.9 5046.5,4752.51 5096.99,4803.01 5539.69,4803.01 RJ1.56@5591.99,4750.7 ; RJ1.48@5040.65,4739.22 4976.87,4803.01 3989.99,4803.01 RJ1.32@3937.89,4750.9 ; RJ1.55@5541.99,4650.7 RJ1.56@5591.99,4750.7 ; P2.1@6166.99,4451.6 RJ1.63@6096.3,4650.7 RJ1.64@6146.3,4750.7 6094,4803.01 5644.3,4803.01 RJ1.56@5591.99,4750.7
  Top Layer w39.37: v6(4379.99,2505.01) 4379.99,2740.01 4484.99,2845.01 v6(4484.99,2965.01)
  Bottom Layer w19.68: v3(2590.01,2509.99) 2710,2510 v3(2785.01,2584.99) 3044.99,2585.01 3134.99,2495.01 3135,2365 3144.99,2355.01 v4(3210.01,2289.99) ; v3(3740.01,2599.99) 3740,2495 v3(3680.01,2434.99) 3679.99,2410.01 3850.99,2239.01 3875.99,2214.01 ; v3(4315.01,3359.99) 4484.99,3530.01 ; 4484.99,3665.01 4499.99,3665.01 4589.99,3575.01 4999.99,3575.01 v3(5095.01,3479.99) v3(5095.01,3179.99) ; v3(4525.01,3779.99) 4550.01,3805.01 4624.99,3805.01 ; U2.1@5654.4,4388.53 5663.87,4398.01 v1(5881.99,4398.01) 6113.4,4398.01 P2.1@6166.99,4451.6
  Bottom Layer w29.53: v4(3210.01,2289.99) 3287.39,2212.61 v4(4090.01,2214.99) ; v6(4379.99,2505.01) v4(4672.4,2212.61) 4675,2210 4955,2210 4988.99,2176.01 v4(5210.01,2176.01)
  Bottom Layer w39.37: v6(4484.99,2965.01) 4484.99,3522.39 4484.99,3665.01 4624.99,3805.01 4899.99,4080.01 5948.8,4080.01 6039.99,4170.01 6039.99,4324.6 P2.1@6166.99,4451.6
A0/1: H7.1 U3.23 | length 1226.5
  Top Layer w10: v1(3060.01,2479.99) 3065.01,2485 3100,2485 3118,2467 U3.23@3117.99,2440.01
  Bottom Layer w10: H7.1@2037.01,2742.99 2089.99,2690.01 2269.99,2690.01 2479.99,2480.01 v1(3060.01,2479.99)
A0/2: U11.23
A1/1: H7.2 U3.24 | length 1133.6
  Top Layer w10: v1(3055.01,2444.99) 3059.99,2440.01 U3.24@3086.49,2440.01
  Bottom Layer w10: H7.2@2037.01,2642.99 2084.99,2595.01 2339.99,2595.01 2489.99,2445.01 v1(3055.01,2444.99)
A1/2: U11.24
A2/1: H7.3 U3.25 | length 1055.7
  Top Layer w10: v1(2965.01,2414.99) 2987.91,2414.99 U3.25@3024.49,2378.41
  Bottom Layer w10: H7.3@2037.01,2542.99 2084.99,2495.01 2409.99,2495.01 2479.99,2425.01 2955,2425 v1(2965.01,2414.99)
A2/2: U11.25
A3/1: H7.4 U3.26 | length 1035.6
  Top Layer w10: v1(2965.01,2379.99) 2998.09,2346.91 U3.26@3024.49,2346.91
  Bottom Layer w10: H7.4@2037.01,2442.99 2085,2395 2395,2395 2405,2405 2914.99,2405.01 2939.99,2380.01 v1(2965.01,2379.99)
A3/2: U11.26
C11_1: C11.1 U18.9 X2.2 | length 308.3
  Top Layer w10: C11.1@3485,3150 3485.01,3006.48 X2.2@3483.54,3005 3485.44,3003.1 U18.9@3485.44,2843.14
C12_1: C12.1 U18.8 X2.1 | length 434.6
  Top Layer w10: U18.8@3511.03,2843.14 3510.99,2876.01 3529.99,2895.01 3629.99,2895.01 3676.49,2941.51 X2.1@3676.46,3005 ; C12.1@3675,3150 3675.01,3006.46 X2.1@3676.46,3005
C14_1: C14.1 U6.4 | length 334.8
  Top Layer w10: U6.4@2569,2098 2568.99,2061.01 2584.99,2045.01 2739.99,2045.01 C14.1@2825.01,1959.99
C15_2: C15.2 U6.13 | length 114.1
  Top Layer w10: U6.13@2569,2332 2569,2374.02 C15.2@2619.99,2425.01
C27_2: C27.2 R17.1 U10.2 | length 240.4
  Top Layer w10: R17.1@5021.99,1963.01 C27.2@5022.01,2057.99 5061.99,2098.01 5061.99,2118.01 5092.99,2149.01 U10.2@5117.99,2149.01
C29_2: C29.2 U11.7 X4.2 | length 456.4
  Top Layer w10: C29.2@4377.01,1902.99 4525.54,1902.99 X4.2@4570.53,1858.01 ; X4.2@4570.53,1858.01 4625.49,1913.01 4681.99,1913.01 4734.99,1966.01 U11.7@4734.99,2001.01
C30_2: C30.2 U11.8 X4.1 | length 358
  Top Layer w10: U11.8@4766.49,2001.01 4763.45,1997.97 X4.1@4763.45,1858.01 4848.44,1773.02 C30.2@4941.98,1773.02
C33_1: C33.1 P7.5 | length 473.3
  Top Layer w10: P7.5@1821.99,2343.01 1980,2185 2144.99,2185 C33.1@2204.99,2124.99
C35_1: C35.1 U12.9 X6.2 | length 366.9
  Top Layer w10: U12.9@4954.56,3776.86 4954.56,3804.56 4970,3820 5093.54,3820 X6.2@5115,3798.54 ; C35.1@5115,3635 X6.2@5115,3798.54